# Allegro board AVRUSB500.brd
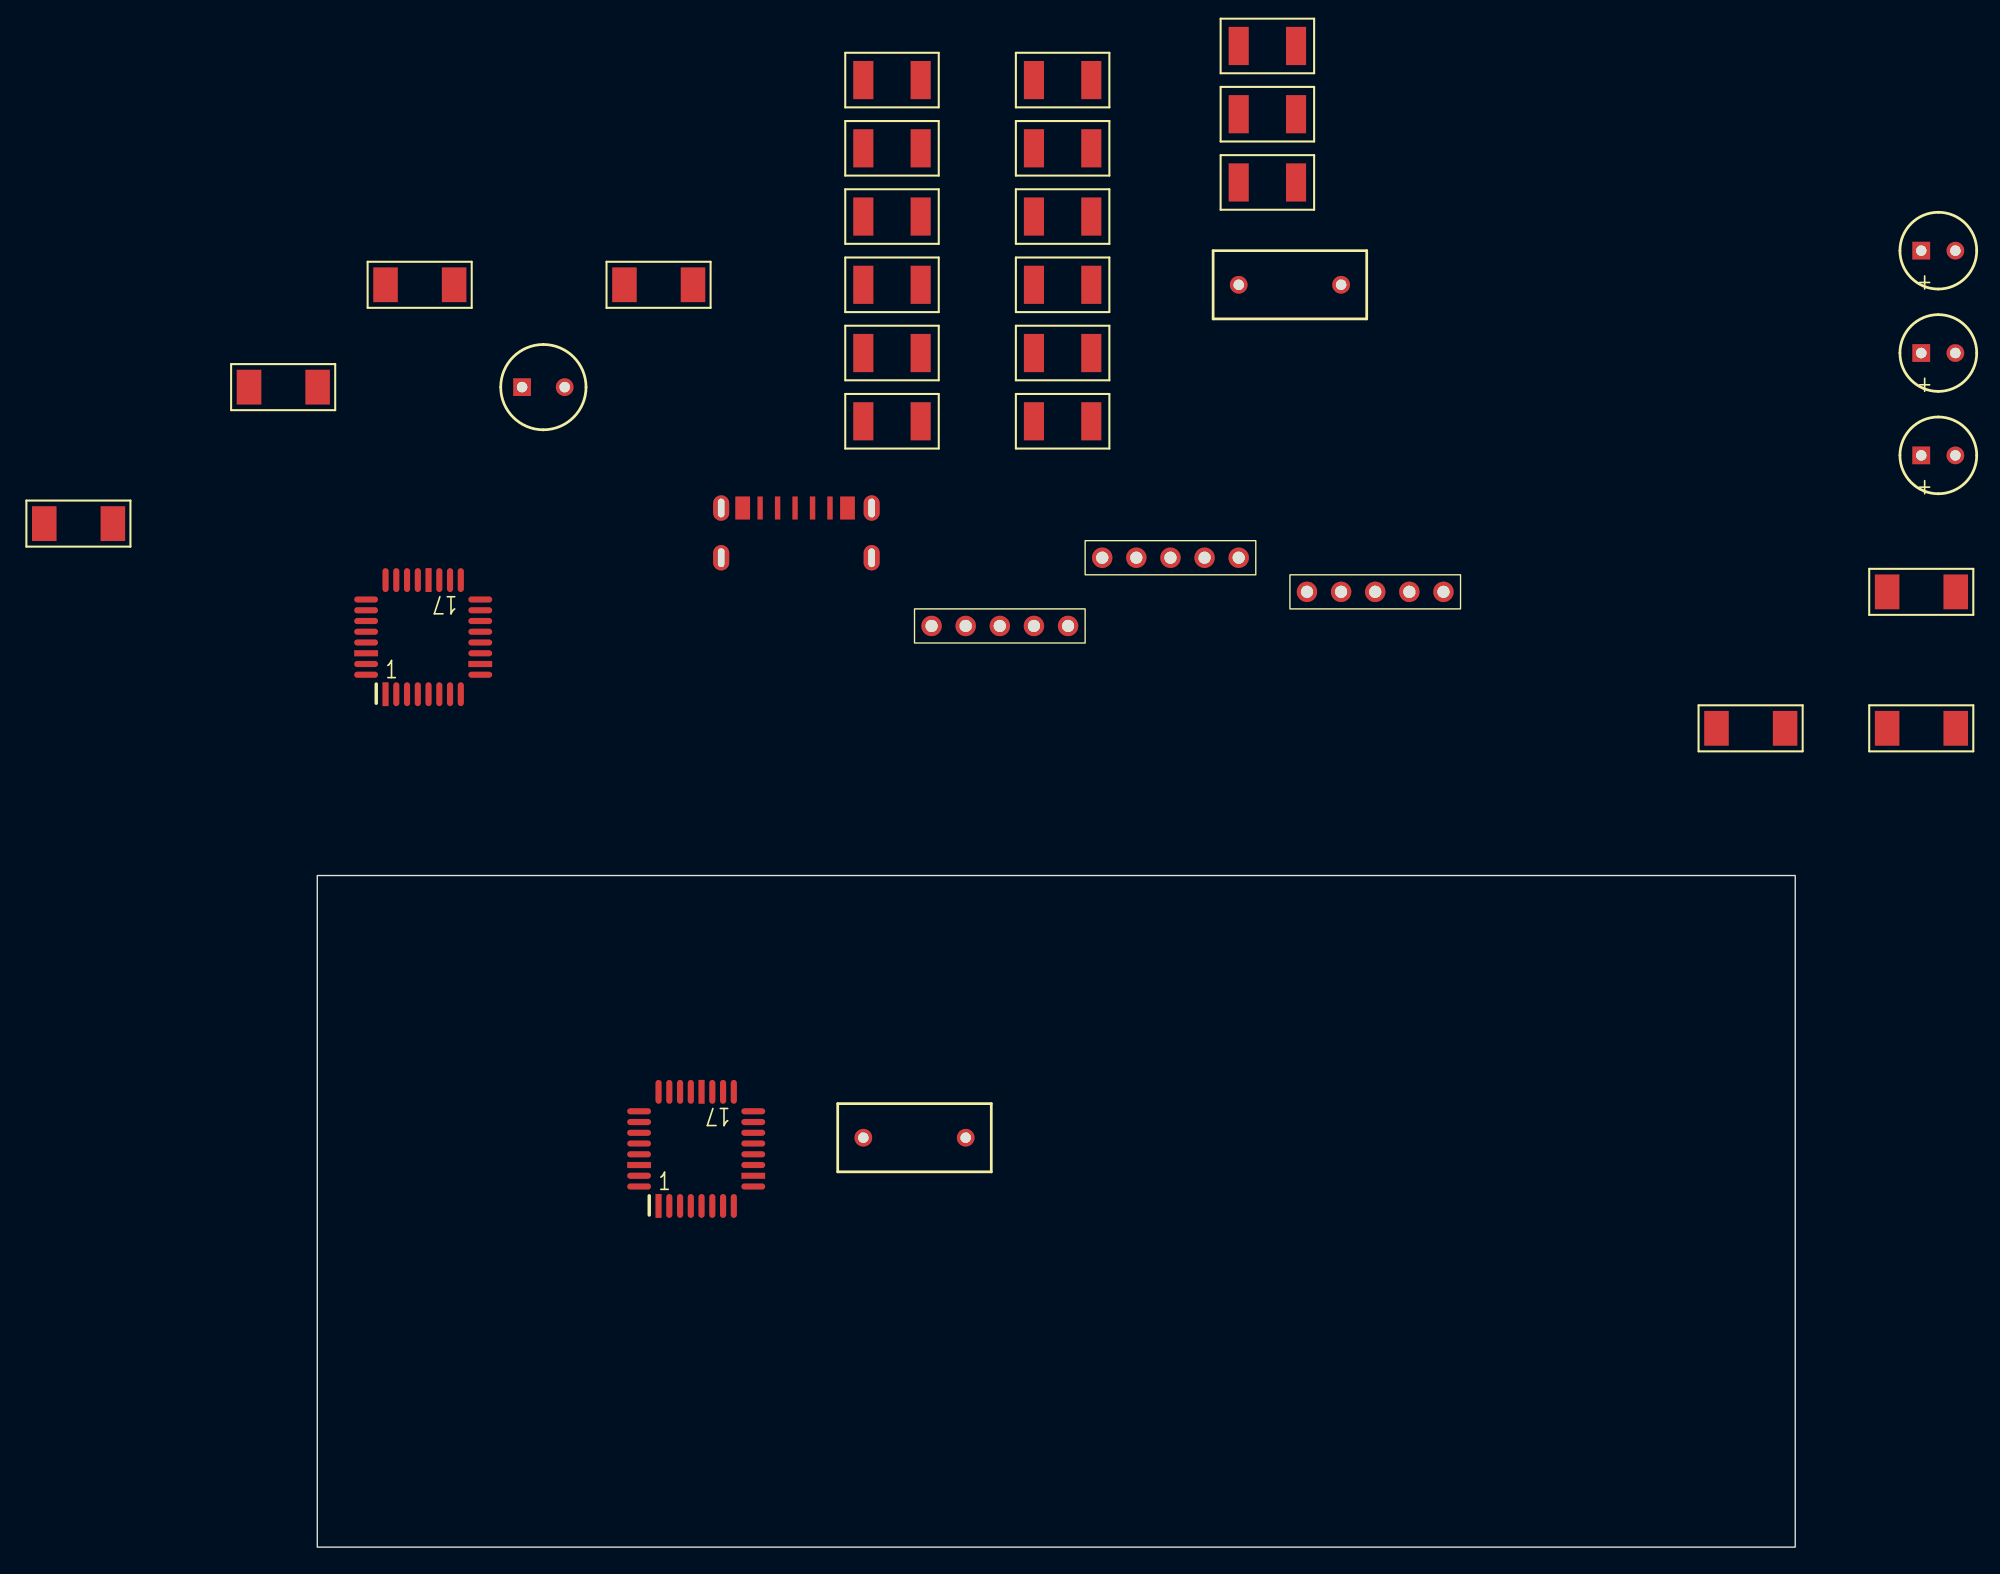
[diagram p0: board, top side]
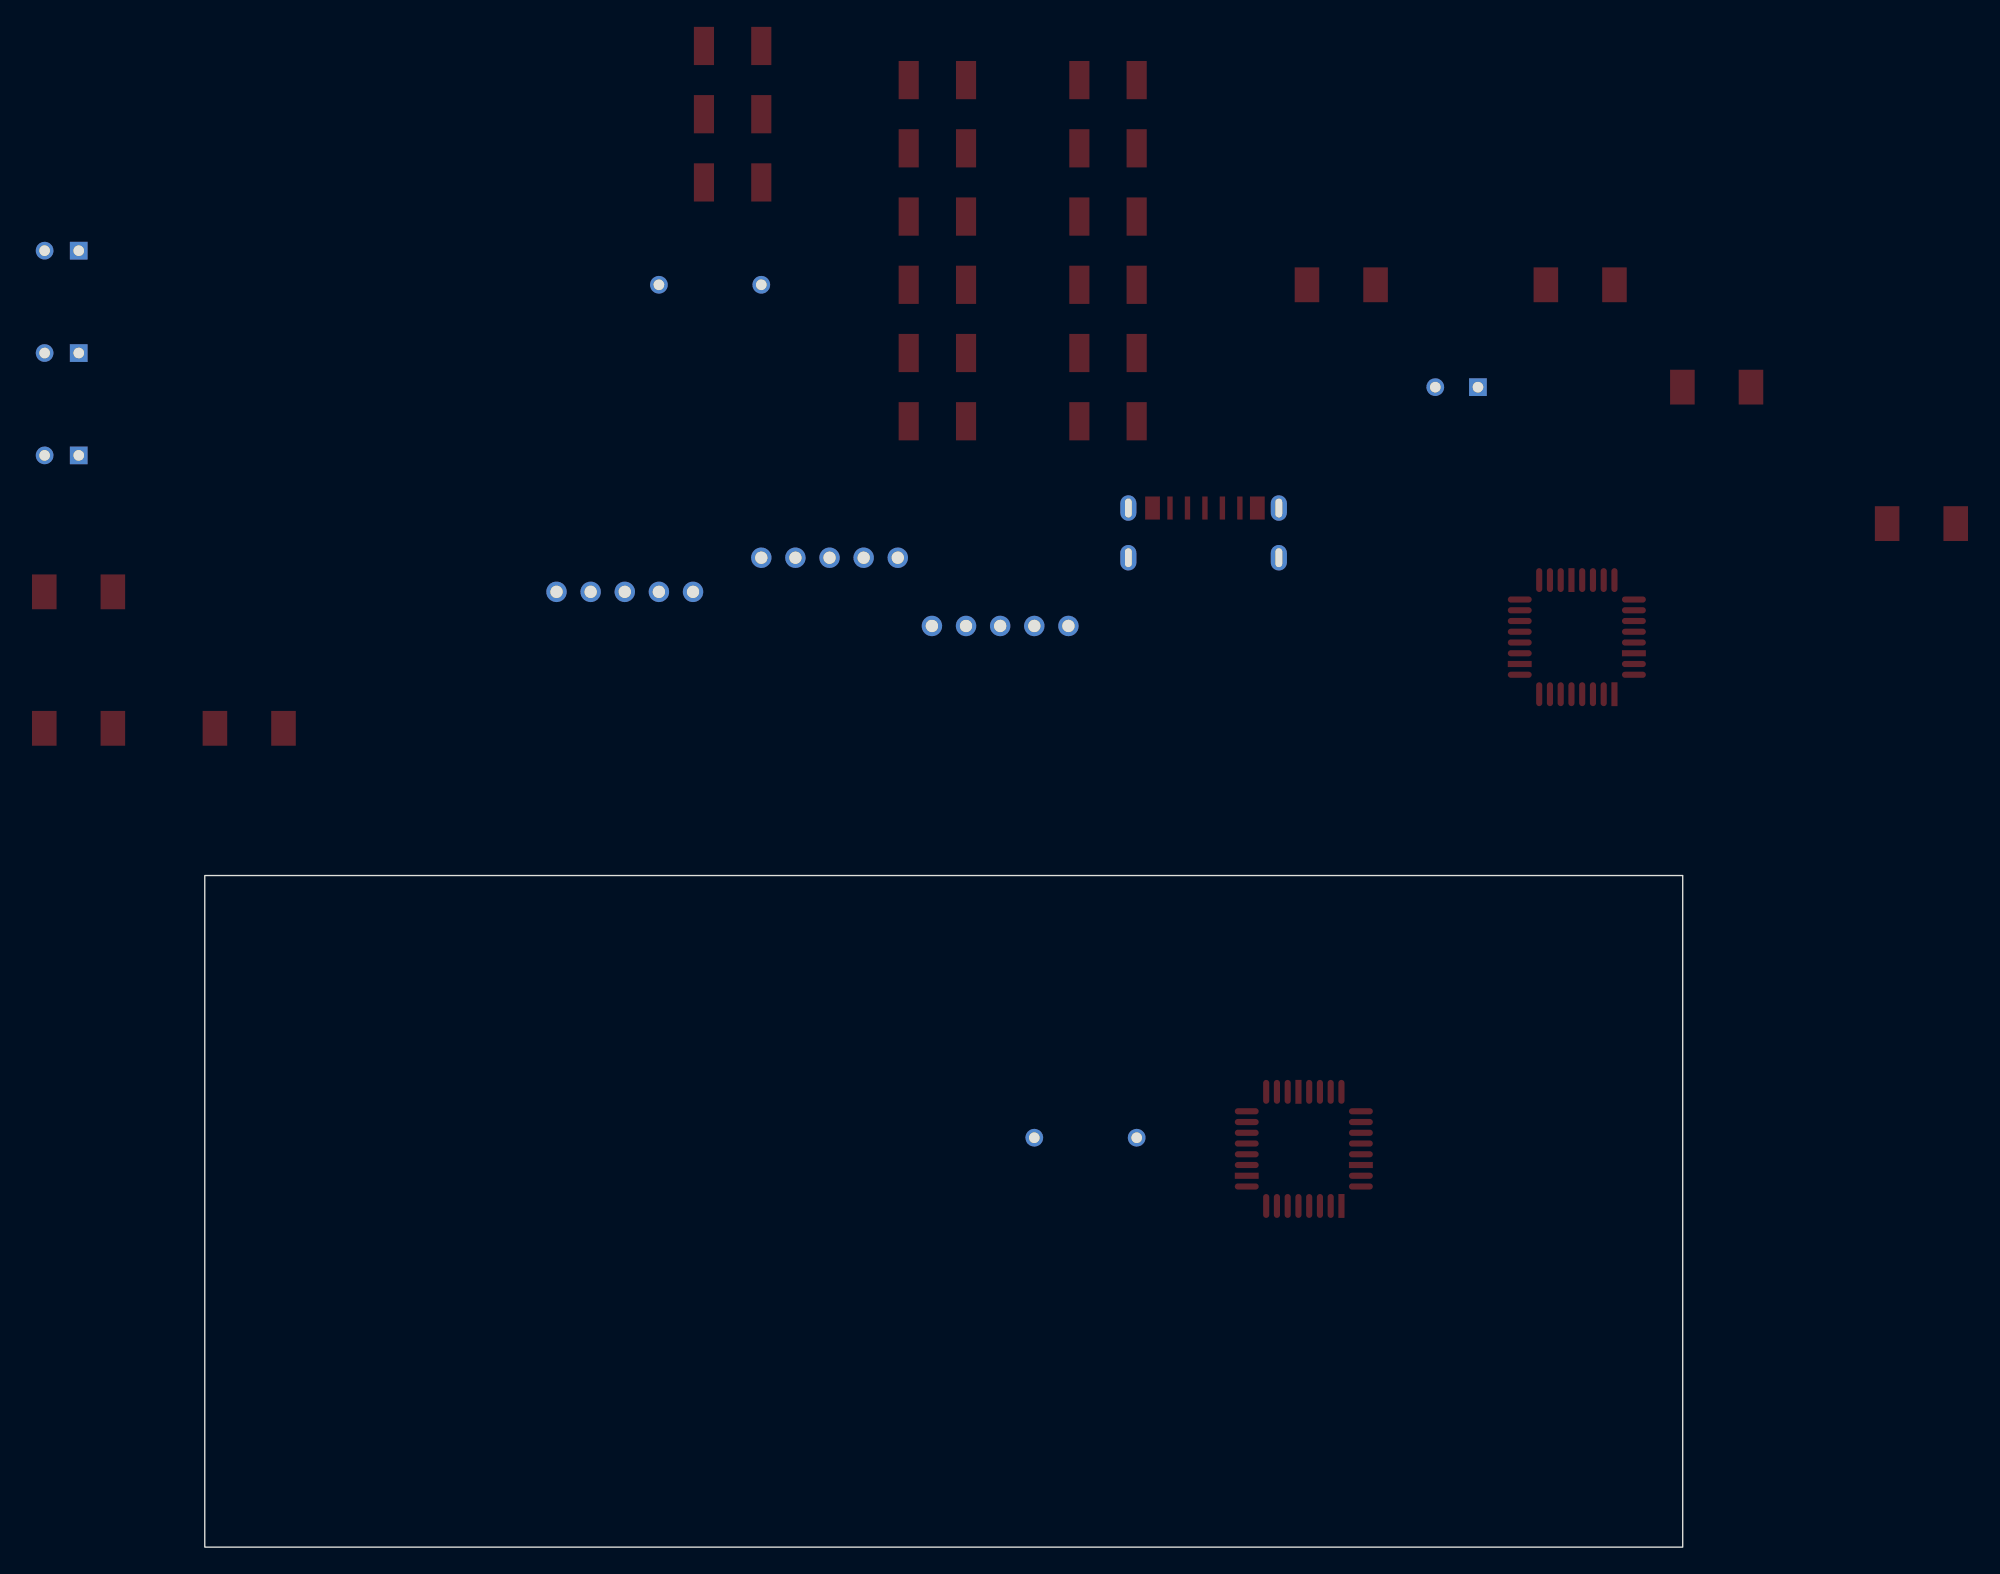
[diagram p1: board, bottom side, seen from below]

Outline 110 x 50 mm; copper layers: TOP, BOTTOM. Coordinates in mm from the lower left corner of the outline.
Outline path: rectangle 0,0 110,50

## Design rules (mm)
constraint set DEFAULT: min track width 0.127

## Placement (name value [footprint] x y rotation side)
C1  47nF  [CPCYL1D225LS100031]  -20.32 76.2 0 top
C2  27pF  [CPCYL1D225LS100031]  116.84 71.12 0 top
C3  27pF  [CPCYL1D225LS100031]  104.14 60.96 0 top
C4  47nF  [CPCYL1D225LS100031]  -5.08 86.36 0 top
C5  100nF  [CPCYL1D225LS100031#2]  119.38 96.52 0 top
C6  1uF  [CPCYL1D225LS100031#2]  119.38 88.9 0 top
C9  100nF  [CPCYL1D225LS100031#2]  119.38 81.28 0 top
C10  22nF  [CPCYL1D225LS100031]  5.08 93.98 0 top
C11  100nF  [CPCYL1D225LS100031]  22.86 93.98 0 top
C12  100nF  [CPCYL1D225LS100031]  116.84 60.96 0 top
D2  LED  [CYLD250LS125031]  15.24 86.36 0 top
IC2  ATmega8  [QUAD80M32WG900]  25.4 25.4 0 top
J1  bbpg_Bitbang  [JUMPER5]  58.42 73.66 0 top
J2  USBA  [MY_USB]  35.56 73.66 0 top
J5  avrusb500_out  [JUMPER5]  45.72 68.58 0 top
J6  firmware_in  [JUMPER5]  73.66 71.12 0 top
R1  470  [AX400X100031]  40.64 109.22 0 top
R2  220  [AX400X100031]  40.64 104.14 0 top
R3  220  [AX400X100031]  40.64 99.06 0 top
R4  220  [AX400X100031]  40.64 93.98 0 top
R5  27  [AX400X100031]  40.64 88.9 0 top
R6  27  [AX400X100031]  40.64 83.82 0 top
R7  1.5k  [AX400X100031]  53.34 109.22 0 top
R8  2.2  [AX400X100031]  53.34 104.14 0 top
R14  220  [AX400X100031]  53.34 99.06 0 top
R16  10k  [AX400X100031]  53.34 93.98 0 top
R17  470  [AX400X100031]  53.34 88.9 0 top
R18  1k  [AX400X100031]  53.34 83.82 0 top
R19  220  [AX400X100031]  68.58 111.76 0 top
R20  1k  [AX400X100031]  68.58 106.68 0 top
R21  220  [AX400X100031]  68.58 101.6 0 top
U1  FT232BM  [QUAD80M32WG900]  5.08 63.5 0 top
Y2  6Mhz  [RAD450X200LS300031]  68.58 93.98 0 top
Y3  3.6864Mhz  [RAD450X200LS300031]  40.64 30.48 0 top

## Library data of the parts
C1-C4 C10-C12 = CAPACITOR NON-POL: alternate symbols: (SMR2010)
C5 C9 = CAPACITOR NON-POL: alternate symbols: (SMDCAP)
C6 = CAPACITOR POL: alternate symbols: (SMDCAP)
D2 = LED
IC2 = ATmega8-DIL28_2
J1 J5 J6 = CON5: User Part Number: ***
J2 = CON4_7
R1-R8 R14 R16-R21 = R: alternate symbols: (SML2015)
U1 = FT232BM_2: alternate symbols: (JEDECMS026)
Y2 Y3 = ZTA

## Footprints (pads in the part's own frame, mm; a bottom-side part is the same pattern mirrored in y, then rotated)
AX400X100031
  rect 1.499x2.845 smd: 1(0,0) 2(4.267,0)
CPCYL1D225LS100031
  rect 1.829x2.591 smd: 1(0,0) 2(5.105,0)
CPCYL1D225LS100031#2
  rect 1.321x1.321 hole 0.787: 1(0,0)
  round 1.321 hole 0.787: 2(2.54,0)
CYLD250LS125031
  rect 1.321x1.321 hole 0.787: 1(0,0)
  round 1.321 hole 0.787: 2(3.175,0)
JUMPER5
  round 1.524 hole 0.914: 1(0,0) 2(2.54,0) 3(5.08,0) 4(7.62,0) 5(10.16,0)
MY_USB
  oval 1.2x1.9 hole 0.5x1.4: (-5.5,3.7) (-5.5,0) (5.7,3.7) (5.7,0)
  rect 1.1x1.72 smd: (-3.9,3.7) (3.9,3.7)
  rect 0.4x1.72 smd: 1(-2.6,3.7) 2(-1.3,3.7) 3(0,3.7) 4(1.3,3.7) 5(2.6,3.7)
QUAD80M32WG900
  rect 0.457x1.778 smd: 1(0,0) 20(3.2,8.496)
  oval 0.457x1.778 smd: 2(0.8,0) 3(1.6,0) 4(2.4,0) 5(3.2,0) 6(4,0) 7(4.801,0) 8(5.601,0) 17(5.601,8.496) 18(4.801,8.496) 19(4,8.496) 21(2.4,8.496) 22(1.6,8.496) 23(0.8,8.496) 24(0,8.496)
  oval 1.778x0.457 smd: 9(7.048,1.448) 11(7.048,3.048) 12(7.048,3.848) 13(7.048,4.648) 14(7.048,5.448) 15(7.048,6.248) 16(7.048,7.048) 25(-1.448,7.048) 26(-1.448,6.248) 27(-1.448,5.448) 28(-1.448,4.648) 29(-1.448,3.848) 31(-1.448,2.248) 32(-1.448,1.448)
  rect 1.778x0.457 smd: 10(7.048,2.248) 30(-1.448,3.048)
RAD450X200LS300031
  round 1.321 hole 0.787: 1(0,0) 2(7.62,0)

## Nets
+5V: J2.4 R8.1
GND: C1.1 C2.1 C3.1 C4.2 C5.2 C6.2 C9.2 C10.1 C11.1 C12.1 IC2.8 IC2.22 J1.5 J2.1 J5.5 J6.5 U1.9 U1.14 U1.17 U1.29 U1.31
VCC: C5.1 C6.1 C9.1 IC2.7(VCC) IC2.20 R1.2 R8.2 R16.1 R17.2 U1.3 U1.4 U1.13 U1.26
BMISO: J1.3 R3.2
BMOSI: J1.2 R4.2
BRESET: J1.1 R14.2
BSCK: C10.2 J1.4 R2.2
D+: J2.2 R6.1
D-: J2.3 R5.1
F_MISO: IC2.18 J6.3 R19.1
F_MOSI: IC2.17 J6.2 R20.1
F_SCK: IC2.19 J6.4 R18.1
MISO: J5.3 R19.2
MOSI: J5.2 R20.2
RESET: IC2.1 J5.1 J6.1 R16.2 R21.2
RXD: IC2.2 U1.24
SCK: J5.4 R18.2
TXD: IC2.3 U1.25
N02483: R6.2 R7.1 U1.7
N02615: R5.2 U1.8
N03527: C4.1 U1.6
N06839: R2.1 U1.21
N06967: R3.1 U1.20
N07033: R4.1 U1.19
N07247: R14.1 U1.18
N11951: R7.2 U1.5
N41098: C3.2 U1.27 Y2.2
N41106: C2.2 U1.28(XTOUT) Y2.1
N49165: C1.2 R1.1 U1.30
N99979: D2.2(CATHODE) IC2.23
N99983: D2.1 R17.1
N99995: C11.2 IC2.9 Y3.2
N100131: C12.2 IC2.10 Y3.1
N100273: IC2.16 R21.1

Pads without a net: IC2 4 5 6 11 12 13 14 15 21 24 25 26 27 28 29 30 31 32; J2 5; U1 1 2 10 11 12 15 16 22 23 32
